# EAGLE board vfd_controller_production (EAGLE 9.6.1)
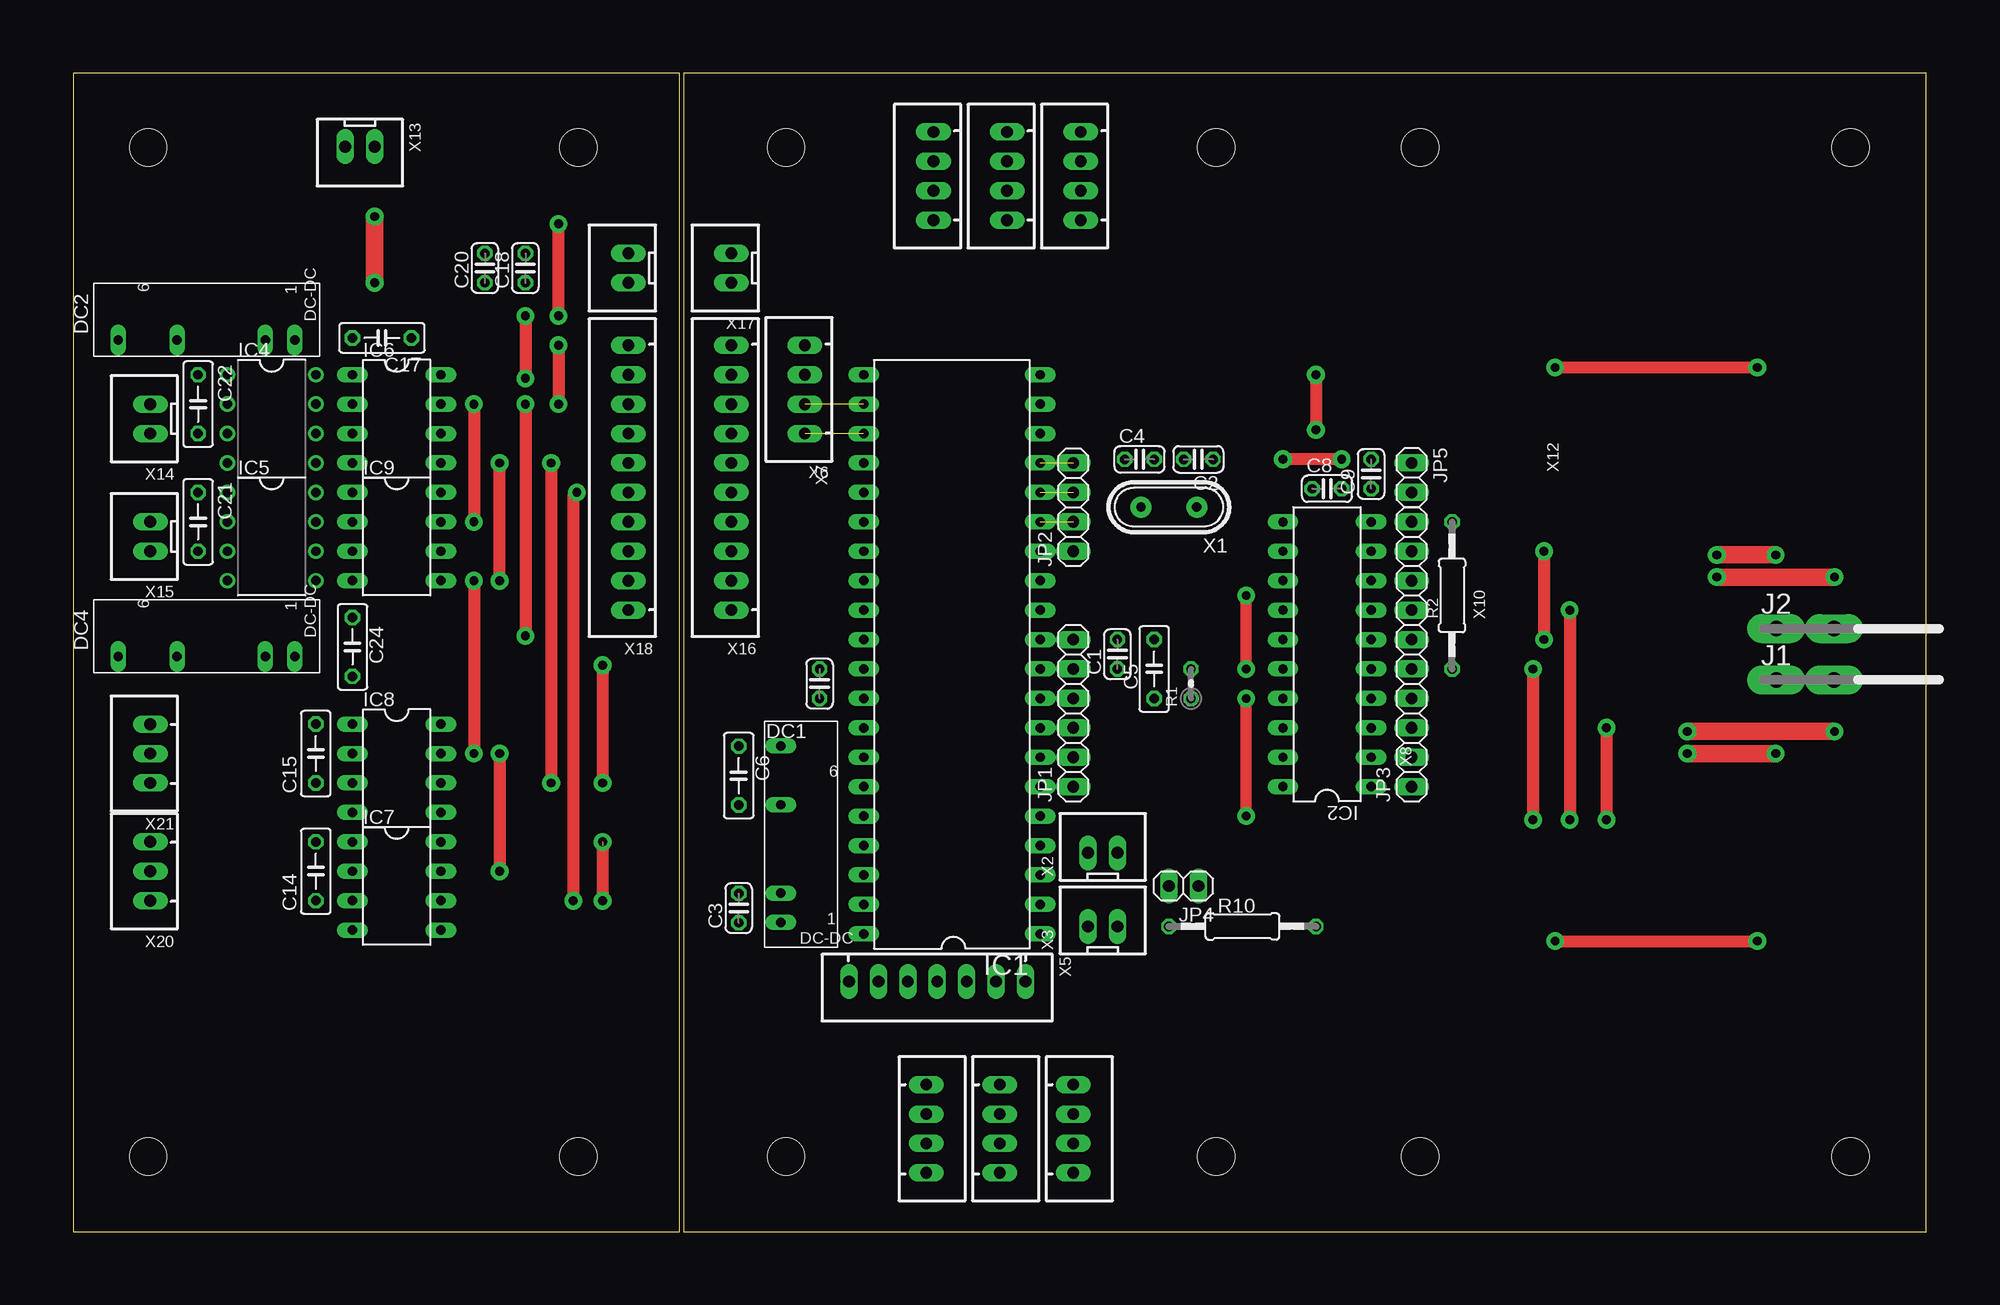
[diagram p0: board, top side]
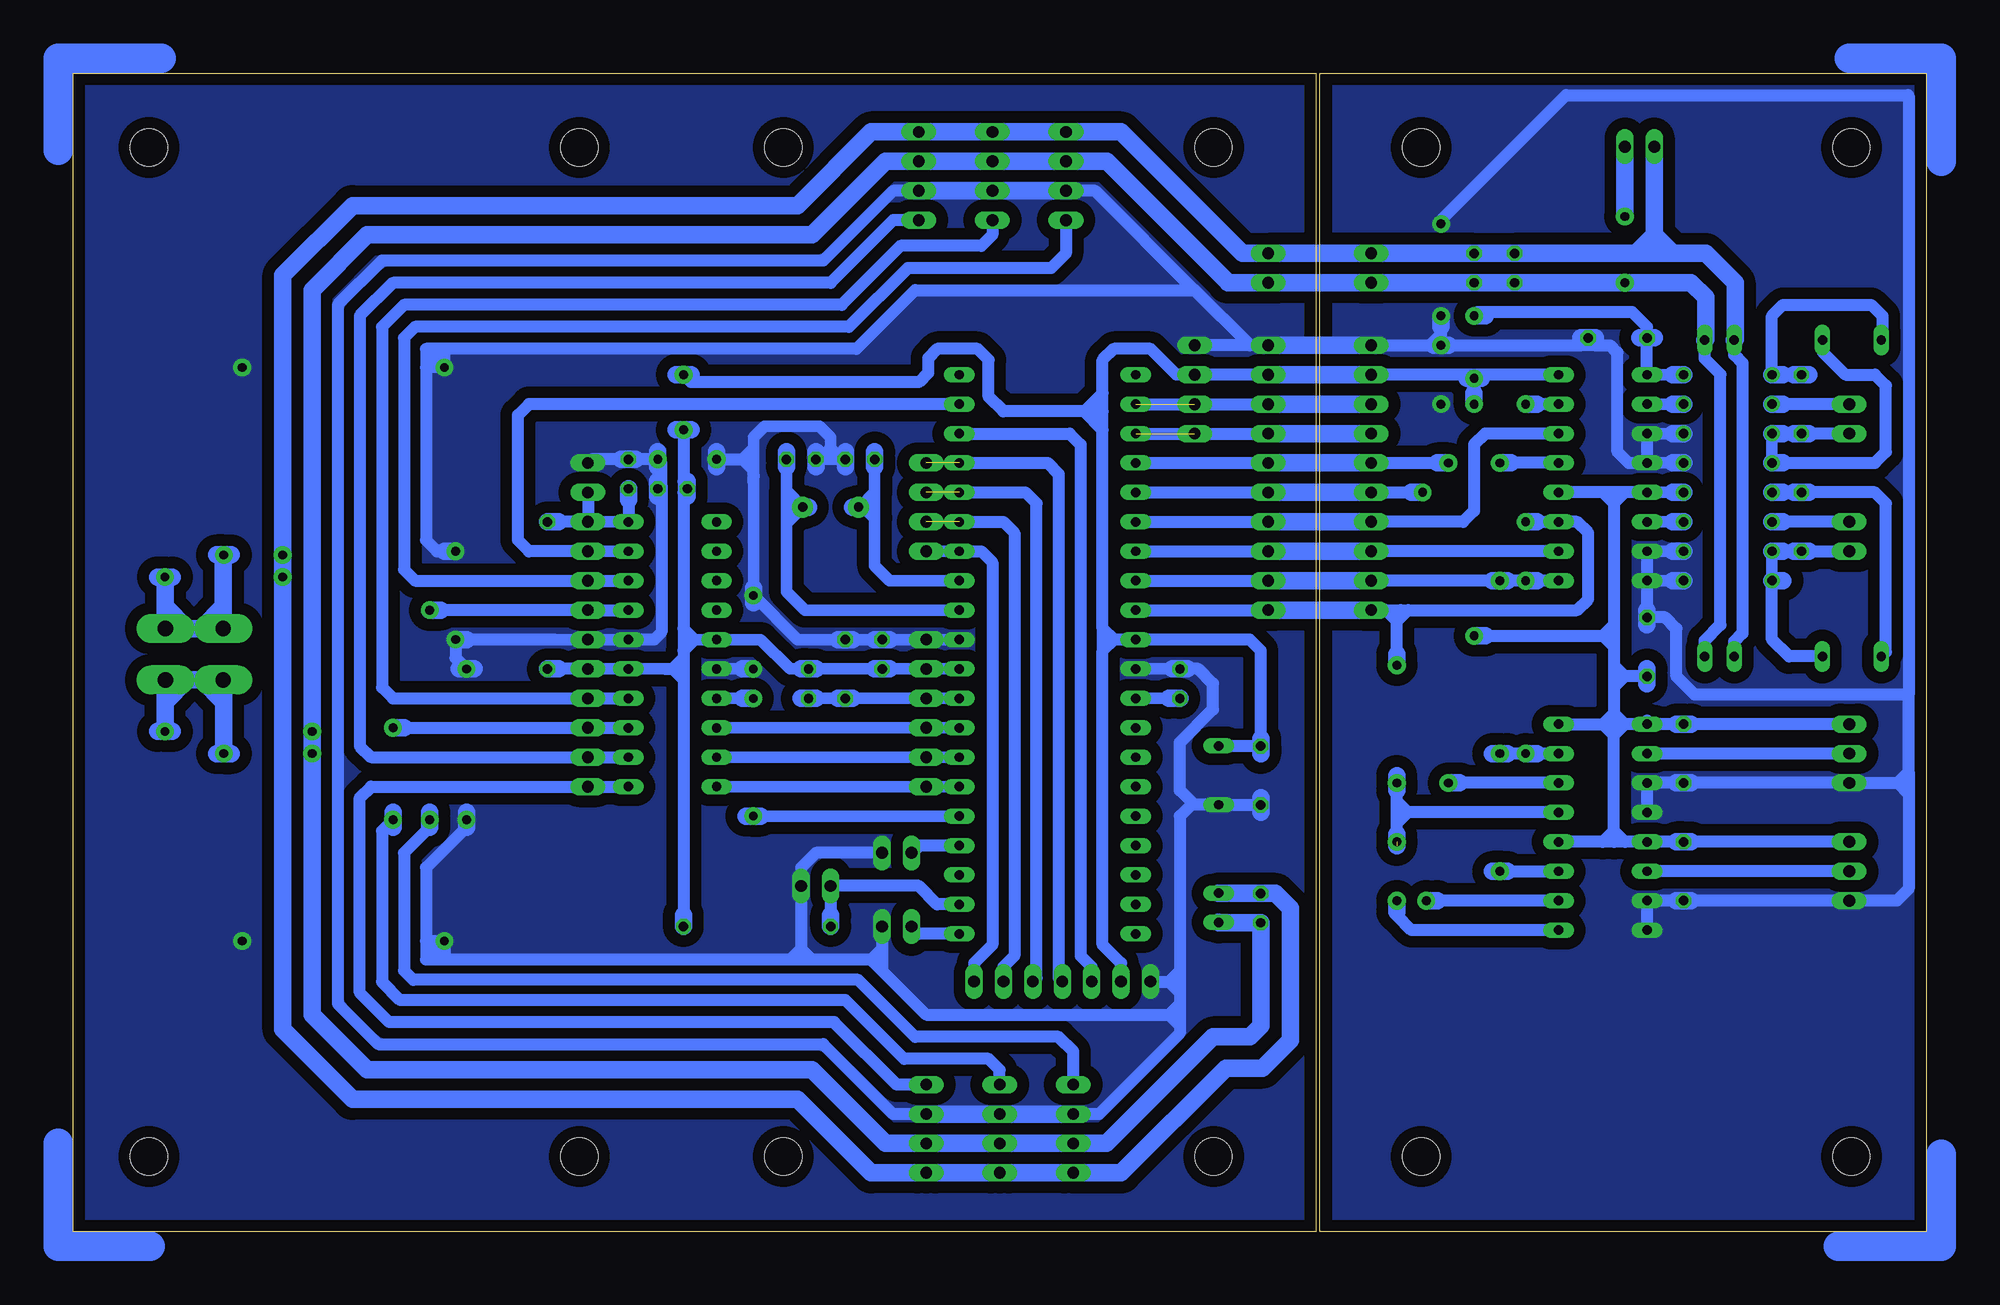
[diagram p1: board, bottom side, seen from below]

Size 160 x 100 mm. Coordinates in mm from the lower left corner, seen from the top.
Outline: 52.71,0 160,0 160,100 52.71,100 52.71,0
Outline: 0,0 52.37,0 52.37,100 0,100 0,0
Copper layers (1*16): Top 0.035mm / dielectric 1.5mm / Bottom 0.035mm
Design rules "default": minimum track width 6mil, minimum drill 0.35mm, track to track 6mil, track to pad 6mil, pad to pad 6mil, via to via 6mil, smd to smd 6mil, copper to edge 40mil, drill to drill 6mil, minimum pad ring 10mil, minimum via ring 8mil, stop-mask expansion 4mil, vias tented up to drill 0mil, thermal gap 10mil
Holes 3.2 mm at 116.31,93.58 153.46,93.58 116.31,6.5 153.46,6.5 61.55,93.58 98.7,93.58 61.55,6.5 98.7,6.5 6.48,93.58 43.62,93.58 6.48,6.5 43.62,6.5

## Footprints (pad centres in the part's own frame; a part is rotated, then mirrored left to right if it is on the bottom)
C025-024X044 = drill 0.813 octagon: 1 -1.27,0; 2 1.27,0
C050-025X075 = drill 0.813 octagon: 1 -2.54,0; 2 2.54,0
MEV = drill 0.813 long: 1 -3.683,-6.756; 2 -3.683,-4.216; 5 -3.683,3.404; 7 -3.683,8.484
DIL40 = drill 0.813 long: 1 -24.13,-7.62; 2 -21.59,-7.62; 3 -19.05,-7.62; 4 -16.51,-7.62; 5 -13.97,-7.62; 6 -11.43,-7.62; 7 -8.89,-7.62; 8 -6.35,-7.62; 9 -3.81,-7.62; 10 -1.27,-7.62; 11 1.27,-7.62; 12 3.81,-7.62; 13 6.35,-7.62; 14 8.89,-7.62; 15 11.43,-7.62; 16 13.97,-7.62; 17 16.51,-7.62; 18 19.05,-7.62; 19 21.59,-7.62; 20 24.13,-7.62; 21 24.13,7.62; 22 21.59,7.62; 23 19.05,7.62; 24 16.51,7.62; 25 13.97,7.62; 26 11.43,7.62; 27 8.89,7.62; 28 6.35,7.62; 29 3.81,7.62; 30 1.27,7.62; 31 -1.27,7.62; 32 -3.81,7.62; 33 -6.35,7.62; 34 -8.89,7.62; 35 -11.43,7.62; 36 -13.97,7.62; 37 -16.51,7.62; 38 -19.05,7.62; 39 -21.59,7.62; 40 -24.13,7.62
DIL20 = drill 0.813 long: 1 -11.43,-3.81; 2 -8.89,-3.81; 3 -6.35,-3.81; 4 -3.81,-3.81; 5 -1.27,-3.81; 6 1.27,-3.81; 7 3.81,-3.81; 8 6.35,-3.81; 9 8.89,-3.81; 10 11.43,-3.81; 11 11.43,3.81; 12 8.89,3.81; 13 6.35,3.81; 14 3.81,3.81; 15 1.27,3.81; 16 -1.27,3.81; 17 -3.81,3.81; 18 -6.35,3.81; 19 -8.89,3.81; 20 -11.43,3.81
DIL08 = drill 0.813 pad 1.3: 1 -3.81,-3.81; 2 -1.27,-3.81; 3 1.27,-3.81; 4 3.81,-3.81; 5 3.81,3.81; 6 1.27,3.81; 7 -1.27,3.81; 8 -3.81,3.81
DIL08' = drill 0.813 long: 1 -3.81,-3.81; 2 -1.27,-3.81; 3 1.27,-3.81; 4 3.81,-3.81; 5 3.81,3.81; 6 1.27,3.81; 7 -1.27,3.81; 8 -3.81,3.81
F061.200 = drill 1.3 pad 2.5 long: 1A -2.5,0; 1B 2.5,0
1X06 = drill 1.016 long: 1 -6.35,0; 2 -3.81,0; 3 -1.27,0; 4 1.27,0; 5 3.81,0; 6 6.35,0
1X04 = drill 1.016 long: 1 -3.81,0; 2 -1.27,0; 3 1.27,0; 4 3.81,0
1X10 = drill 1.016 long: 1 -11.43,0; 2 -8.89,0; 3 -6.35,0; 4 -3.81,0; 5 -1.27,0; 6 1.27,0; 7 3.81,0; 8 6.35,0; 9 8.89,0; 10 11.43,0
1X02 = drill 1.016 long: 1 -1.27,0; 2 1.27,0
0204V = drill 0.813 octagon: 1 -1.27,0; 2 1.27,0
0207/12 = drill 0.813 octagon: 1 -6.35,0; 2 6.35,0
HC49 = drill 0.813 pad 1.8: 1 -2.413,0; 2 2.413,0
JST-XH-02-PACKAGE-LONG-PAD = drill 1.016 long: 1 -1.27,0; 2 1.27,0
JST-XH-07-PACKAGE-LONG-PAD = drill 1.016 long: 1 -7.62,0; 2 -5.08,0; 3 -2.54,0; 4 0,0; 5 2.54,0; 6 5.08,0; 7 7.62,0
JST-XH-04-PACKAGE-LONG-PAD = drill 1.016 long: 1 -3.81,0; 2 -1.27,0; 3 1.27,0; 4 3.81,0
JST-XH-10-PACKAGE-LONG-PAD = drill 1.016 long: 1 -11.43,0; 2 -8.89,0; 3 -6.35,0; 4 -3.81,0; 5 -1.27,0; 6 1.27,0; 7 3.81,0; 8 6.35,0; 9 8.89,0; 10 11.43,0
JST-XH-03-PACKAGE-LONG-PAD = drill 1.016 long: 1 -2.54,0; 2 0,0; 3 2.54,0

## Placement (x,y rotation side)
C1  100n  [C025-024X044]  90.17,49.85 90 top
C2  22p  [C025-024X044]  97.16,66.67 180 top
C3  100n  [C025-024X044]  57.47,27.94 90 top
C4  22p  [C025-024X044]  92.08,66.67 0 top
C5  100n  [C050-025X075]  93.34,48.58 90 top
C6  100n  [C050-025X075]  57.47,39.37 270 top
C7  100n  [C025-024X044]  64.45,47.31 90 top
C8  100n  [C025-024X044]  108.27,64.14 0 top
C9  100n  [C025-024X044]  112.08,65.41 90 top
C14  100n  [C050-025X075]  20.96,31.11 90 top
C15  100n  [C050-025X075]  20.96,41.28 90 top
C17  100n  [C050-025X075]  26.67,77.15 180 top
C18  100n  [C025-024X044]  39.05,83.19 90 top
C20  100n  [C025-024X044]  35.56,83.19 90 top
C21  100n  [C050-025X075]  10.79,61.28 270 top
C22  100n  [C050-025X075]  10.79,71.44 270 top
C24  100n  [C050-025X075]  24.13,50.48 270 top
DC1  12V in, 5V out  [MEV]  64.8,33.45 0 top
DC2  12V in, 5V out  [MEV]  12.38,80.64 90 top
DC4  12V in, 5V out  [MEV]  12.38,53.34 90 top
IC1  Atmega1284P  [DIL40]  75.88,49.85 90 top
IC2  Attiny861A  [DIL20]  108.27,49.85 90 top
IC4  HCPL-7840  [DIL08]  17.15,70.17 270 top
IC5  HCPL-7840  [DIL08]  17.15,60.01 270 top
IC6  MPC3201  [DIL08']  27.94,70.17 270 top
IC7  MPC3201  [DIL08']  27.94,29.84 270 top
IC8  MPC3201  [DIL08']  27.94,40 270 top
IC9  MPC3201  [DIL08']  27.94,60.01 270 top
J1  [F061.200]  149.54,47.62 0 top
J2  [F061.200]  149.54,52.07 0 top
JP1  1x6  [1X06]  86.36,44.77 90 top
JP2  1x4  [1X04]  86.36,62.55 90 top
JP3  1x10  [1X10]  115.57,49.85 90 top
JP4  [1X02]  95.89,29.84 180 top
JP5  [1X02]  115.57,65.09 270 top
R1  10k  [0204V]  96.52,47.31 90 top
R2  10k  [0207/12]  119.06,54.93 90 top
R10  10k  [0207/12]  100.97,26.35 0 top
U$1  [A4L-LOC]  -53.98,-45.72 0 top  (outside the outline)
X1  20MHz  [HC49]  94.62,62.55 180 top
X2  [JST-XH-02-PACKAGE-LONG-PAD]  88.9,32.7 0 top
X3  [JST-XH-02-PACKAGE-LONG-PAD]  88.9,26.35 0 top
X5  JST-XH-07-PIN-LONG-PAD  [JST-XH-07-PACKAGE-LONG-PAD]  74.61,21.59 180 top
X6  [JST-XH-04-PACKAGE-LONG-PAD]  63.18,72.71 90 top
X7  [JST-XH-04-PACKAGE-LONG-PAD]  86.36,8.89 270 top
X8  [JST-XH-04-PACKAGE-LONG-PAD]  87,91.12 90 top
X9  [JST-XH-04-PACKAGE-LONG-PAD]  80.01,8.89 270 top
X10  [JST-XH-04-PACKAGE-LONG-PAD]  80.65,91.12 90 top
X11  [JST-XH-04-PACKAGE-LONG-PAD]  73.66,8.89 270 top
X12  [JST-XH-04-PACKAGE-LONG-PAD]  74.3,91.12 90 top
X13  JST-XH-02-PIN-LONG-PAD  [JST-XH-02-PACKAGE-LONG-PAD]  24.76,93.66 180 top
X14  [JST-XH-02-PACKAGE-LONG-PAD]  6.67,70.17 90 top
X15  [JST-XH-02-PACKAGE-LONG-PAD]  6.67,60.01 90 top
X16  JST-XH-10-PIN-LONG-PAD  [JST-XH-10-PACKAGE-LONG-PAD]  56.83,65.09 90 top
X17  JST-XH-02-PIN-LONG-PAD  [JST-XH-02-PACKAGE-LONG-PAD]  56.83,83.19 90 top
X18  JST-XH-10-PIN-LONG-PAD  [JST-XH-10-PACKAGE-LONG-PAD]  47.94,65.09 90 top
X19  JST-XH-02-PIN-LONG-PAD  [JST-XH-02-PACKAGE-LONG-PAD]  47.94,83.19 90 top
X20  JST-XH-03-PIN-LONG-PAD  [JST-XH-03-PACKAGE-LONG-PAD]  6.67,31.11 90 top
X21  JST-XH-03-PIN-LONG-PAD  [JST-XH-03-PACKAGE-LONG-PAD]  6.67,41.28 90 top

## Library data of the parts
C1 C3 C7-C9 C18 C20 = rcl; R: MKS02-63 100N; SPICEPREFIX: C
C2 C4 = rcl; R: KERKO 22p; SPICEPREFIX: C
C5 C6 C14 C15 C17 C21 C22 C24 = rcl; R: MKS2-63 100N; SPICEPREFIX: C
DC1 DC2 DC4 = custom; R: MEV1S1205SC
IC1 = ic-package; R: ATMEGA 1284-P-PU
IC2 = ic-package; R: ATTINY 861A-PU
IC4 IC5 = avago; MPN: HCPL-7800A#500; OC_FARNELL: 459446; OC_NEWARK: 05M6395
IC6-IC9 = ic-package; R: MPC 3201-CI/P
J1 J2 = con-faston; OC_FARNELL: unknown; OC_NEWARK: unknown; R: FS-PW-6,35
JP1 = pinhead; R: MPE 087-1-006
JP2 = pinhead; R: MPE 087-1-004
JP3 = pinhead; R: MPE 087-1-010
JP4 JP5 = pinhead
R1 R2 R10 = rcl; R: METALL 10,0K; SPICEPREFIX: R
U$1 = frames
X1 = IQD-Frequency-Products; R: 20,0000-HC49U-S
X2 X3 X14 X15 =  JST_XH_connnectors; R: JST XH2P ST
X5 X13 X16-X21 =  JST_XH_connnectors
X6-X12 =  JST_XH_connnectors; R: JST XH4P ST

## Nets
0V: C3.2 C18.2 C20.2 DC1.2 DC2.2 DC4.2 J2.1A J2.1B X7.4 X8.4 X9.4 X10.4 X11.4 X12.4 X13.2 X17.2 X19.2
232RX: IC1.16 JP2.3 X5.3
232TX: IC1.17 JP2.4 X5.4
485DE: IC1.18 X5.5
485RX: IC1.14 JP2.1 X5.1
485TX: IC1.15 JP2.2 X5.2
+5V: C1.1 C6.1 C8.1 C14.2 C15.2 C17.2 C24.2 DC1.7 IC1.10 IC1.30 IC2.5 IC2.15 IC4.8 IC5.8 IC6.1 IC6.8 IC7.1 IC7.8 IC8.1 IC8.8 IC9.1 IC9.8 JP1.5 JP3.5 R1.2 R2.1 R10.2 X5.6 X6.3 X16.9 X18.9 X20.3 X21.3
+12V: C3.1 C18.1 C20.1 DC1.1 DC2.1 DC4.1 J1.1A J1.1B X7.3 X8.3 X9.3 X10.3 X11.3 X12.3 X13.1 X17.1 X19.1
EN_SVPWM: IC1.19 IC2.9 JP3.9
GND: C1.2 C2.2 C4.2 C5.2 C6.2 C7.2 C8.2 C9.2 C14.1 C15.1 C17.1 C24.1 DC1.5 IC1.11 IC1.31 IC2.6 IC2.16 IC4.5 IC4.6 IC5.5 IC5.6 IC6.3 IC6.4 IC7.3 IC7.4 IC8.3 IC8.4 IC9.3 IC9.4 JP1.6 JP3.6 JP4.1 JP5.1 X2.2 X3.2 X5.7 X6.4 X7.2 X8.2 X9.2 X10.2 X11.2 X12.2 X16.10 X18.10 X20.1 X21.1
H1: IC2.1 JP3.1 X7.1
H2: IC2.3 JP3.3 X9.1
H3: IC2.7 JP3.7 X11.1
IO0: IC1.22 X6.2 X16.8 X18.8
IO1: IC1.23 X6.1 X16.7 X18.7
IO2: IC1.24 IC8.6 X16.6 X18.6
IO3: IC1.25 IC7.6 X16.5 X18.5
IO4: IC1.26 IC6.6 X16.4 X18.4
IO5: IC1.27 IC9.6 X16.3 X18.3
IO6: IC1.28 IC6.5 IC7.7 IC8.7 IC9.5 X16.2 X18.2
IO7: IC1.29 IC6.7 IC7.5 IC8.5 IC9.7 X16.1 X18.1
L1: IC2.2 JP3.2 X8.1
L2: IC2.4 JP3.4 X10.1
L3: IC2.8 JP3.8 X12.1
MISO: IC1.7 IC2.19 JP1.2
MOSI: IC1.6 IC2.20 JP1.1
N$2: IC8.2 X21.2
N$3: IC7.2 X20.2
N$4: IC1.1 X3.1
N$5: C21.1 DC4.7 IC5.1
N$13: C21.2 DC4.5 IC5.3 IC5.4 X15.1
N$14: IC4.2 X14.2
N$16: C7.1 IC1.32
N$17: IC4.7 IC6.2
N$19: C22.2 DC2.5 IC4.3 IC4.4 X14.1
N$21: IC5.2 X15.2
N$22: C22.1 DC2.7 IC4.1
N$23: IC1.4 X2.1
N$24: IC1.2 JP4.2 R10.1
N$32: IC5.7 IC9.2
N$37: C9.1 IC2.10 JP3.10 JP5.2 R2.2
N$41: C5.1 IC1.9 JP1.4 R1.1
N$43: C2.1 IC1.12 X1.1
N$44: C4.1 IC1.13 X1.2
SCK: IC1.8 IC2.18 JP1.3
SS: IC1.5 IC2.17

## Tracks (layer width: path | path; a pad name or v marks a point on that pad's centre or on a via)
0V  (via drill 0.76 pad 1.52)
  Top 1.524: v141.92,58.42 v147,58.42 | v152.08,56.52 v141.92,56.52
  Bottom 1.016: DC4.2 16.6,50.93 15.87,51.65 15.87,74.97 16.6,75.69 DC2.2
  Bottom 1.524: 148.91,52.07 J2.1A 147.04,53.97 | 148.91,52.07 150.18,52.07 | 150.18,52.07 J2.1B 152.08,52.11 152.08,53.97 | DC1.2 61.09,29.21 C3.2 56.2,29.21 54.93,27.94 54.93,16.51 57.31,14.13 60.48,14.13 69.53,5.08 X11.4 X9.4 X7.4 91.12,5.08 97.47,11.43 135.89,11.43 141.92,17.46 v141.92,58.42 141.92,82.55 135.89,88.58 97.47,88.58 91.12,94.93 X8.4 X10.4 X12.4 69.53,94.93 59.05,84.46 X17.2 X19.2 C18.2 C20.2 25.08,84.46 | v152.08,56.52 152.08,53.97 | v147,58.42 147.04,58.38 147.04,53.97 | 147.04,53.97 148.91,52.11 148.91,52.07 | 152.08,53.97 150.18,52.07 | v147,58.42 146.37,58.42 | v147,58.42 147.64,58.42 | v152.08,56.52 151.45,56.52 | v152.08,56.52 152.72,56.52 | X13.2 23.49,86.04 | 23.49,84.46 23.49,86.04 | 23.49,84.46 25.08,84.46 | DC2.2 16.51,77.05 16.51,81.92 19.05,84.46 21.91,84.46 | 23.49,84.46 21.91,84.46 | 23.49,86.04 21.91,84.46 | 23.49,86.04 25.08,84.46
232RX  (1 unrouted)
  Bottom 1.016: IC1.16 77.79,63.82 76.84,62.86 76.84,21.91 X5.3
232TX  (1 unrouted)
  Bottom 1.016: IC1.17 75.88,66.36 74.93,65.41 74.93,21.91 X5.4
485DE
  Bottom 1.016: IC1.18 73.98,68.9 73.03,67.95 73.03,23.81 72.07,22.86 X5.5
485RX
  Bottom 1: IC1.14 JP2.1
  Bottom 1.016: IC1.14 81.6,58.74 80.65,57.78 80.65,24.77 82.23,23.18 X5.1
485TX  (1 unrouted)
  Bottom 1.016: IC1.15 79.69,61.28 78.74,60.33 78.74,23.81 79.69,22.86 X5.2
+5V  (via drill 0.76 pad 1.52)
  Top 1.016: v107.31,73.98 v107.31,69.22 | v39.05,71.44 v39.05,51.44 | v39.05,79.06 v39.05,73.66
  Bottom 1: IC1.10 JP1.5 89.53,48.58 | JP3.5 IC2.5 108.9,48.58 | 107.31,50.17 106.36,51.12 IC2.15 100.65,51.12 98.11,48.58 97.16,48.58 | C1.1 95.89,48.58 | 21.91,63.82 IC9.1 | 21.91,73.98 IC6.1
  Bottom 1.016: X16.9 X6.3 | X6.3 64.13,73.98 | X6.3 64.77,73.98 66.99,76.2 70.17,76.2 71.12,75.25 71.12,72.39 | C6.1 61.09,41.91 DC1.7 | 70.17,51.12 IC1.30 58.42,51.12 57.47,50.17 57.47,42.55 | 70.17,51.12 71.12,52.07 | 71.12,52.07 71.12,69.22 | 71.12,69.22 71.12,70.8 | 71.12,70.8 71.12,72.39 | 70.17,51.12 71.12,50.17 | 71.12,50.17 71.12,24.77 69.53,23.18 X5.6 | 71.12,52.07 71.12,50.17 | v107.31,73.98 106.68,73.34 87,73.34 86.2,74.14 86.2,75.41 85.41,76.2 81.91,76.2 80.96,75.25 80.96,72.07 79.69,70.8 72.71,70.8 | 107.31,52.07 106.36,51.12 | v107.31,69.22 107.31,64.77 | 107.31,64.77 107.31,63.82 | 107.31,63.82 107.31,52.07 | 107.31,49.53 107.31,50.17 107.31,52.07 | 107.31,49.53 107.31,47.62 | 107.31,47.62 107.31,27.31 | 108.27,48.58 107.31,49.53 | 108.9,48.58 108.27,48.58 | 108.27,48.58 107.31,47.62 | 71.12,69.22 72.71,70.8 | 72.71,70.8 71.12,72.39 | 72.71,70.8 71.12,70.8 | JP3.5 118.11,48.58 | 107,64.45 107.31,64.77 | C8.1 107.31,63.82 | IC6.8 38.1,73.98 | 38.1,73.98 40.01,73.98 | 40.01,73.98 X18.9 | 39.05,72.39 39.05,73.03 | 39.05,73.03 38.42,73.66 38.1,73.98 | 39.05,73.03 39.69,73.66 40.01,73.98 | 27.94,63.82 26.99,62.86 | 27.94,63.82 IC9.8 | 26.99,62.86 26.04,63.82 | IC9.1 26.04,63.82 | 26.04,63.82 27.94,63.82 | X20.3 20.32,33.66 | 21.59,33.66 IC7.1 26.04,33.66 | X21.3 20.32,43.81 | 21.59,43.81 23.81,43.81 24.13,44.13 IC8.1 26.04,43.81 | IC8.8 27.94,43.81 | 27.94,43.81 26.99,43.81 | 26.04,43.81 26.99,43.81 | 26.04,33.66 26.99,33.66 | 26.99,33.66 27.94,33.66 | 27.94,33.66 IC7.8 | 26.99,62.86 26.99,52.39 | 26.99,52.39 26.99,50.48 | 26.99,50.48 26.99,48.89 | 26.99,48.89 26.99,46.99 | 26.99,46.99 26.99,44.77 | IC6.1 C17.2 24.13,78.11 25.4,79.38 38.73,79.38 v39.05,79.06
  Bottom 1.016: 26.99,43.81 26.99,44.77 | 26.99,43.81 26.99,42.86 | 26.99,34.61 26.99,42.86 | 26.99,33.66 26.99,34.61 | 26.99,34.61 26.04,33.66 | 26.99,34.61 27.94,33.66 | 26.99,42.86 26.04,43.81 | 26.99,42.86 27.94,43.81 | 26.99,44.77 26.04,43.81 | 26.99,44.77 27.94,43.81 | C24.2 26.04,47.94 | 26.99,48.89 26.04,47.94 | 26.04,47.94 26.99,46.99 | 26.99,50.48 27.94,51.44 | 38.1,51.44 27.94,51.44 | 27.94,51.44 26.99,52.39
  Bottom 1.524: 90.81,48.58 C1.1 89.53,48.58 | C8.1 107,63.82 | C8.1 107,64.45 | C8.1 107,64.77 | C8.1 107,63.5 | 106.68,69.22 v107.31,69.22 107.95,69.22 | R2.1 118.11,48.58 | R10.2 107.31,27.31 | 95.89,48.58 R1.2 97.16,48.58 | 106.68,73.98 v107.31,73.98 107.95,73.98 | 57.47,41.28 C6.1 57.47,42.55 | IC5.8 21.91,63.82 | 20.32,33.66 C14.2 21.59,33.66 | 20.32,43.81 C15.2 21.59,43.81 | 24.13,47.31 C24.2 24.13,48.58 | IC4.8 21.91,73.98 | 23.49,77.15 C17.2 24.76,77.15 | v39.05,79.06 38.1,79.06 | 38.42,73.66 v39.05,73.66 39.69,73.66 | v39.05,71.44 39.05,72.39 | v39.05,51.44 38.1,51.44 | X18.9 X16.9
+12V  (via drill 0.76 pad 1.52)
  Top 1.524: v139.38,41.28 v147,41.28 | v139.38,43.18 v152.08,43.18 | v26.04,87.63 v26.04,81.92
  Bottom 1.016: DC4.1 19.14,51.03 17.78,52.39 17.78,74.02 19.14,75.37 DC2.1
  Bottom 1.524: 148.91,47.62 J1.1A 147,47.59 147,45.72 | 148.91,47.62 150.18,47.62 | 150.18,47.62 J1.1B 152.08,47.59 152.08,45.72 | DC1.1 61.09,26.67 C3.1 57.47,17.78 58.42,16.83 61.59,16.83 70.8,7.62 X11.3 X9.3 X7.3 89.85,7.62 96.2,13.97 134.62,13.97 139.38,18.73 v139.38,41.28 139.38,81.28 134.62,86.04 96.2,86.04 89.85,92.39 X8.3 X10.3 X12.3 70.76,92.39 60.32,81.96 60.32,81.92 X17.1 X19.1 C18.1 C20.1 | v152.08,43.18 152.08,45.72 | v147,41.28 147,45.72 | 147,45.72 148.91,47.62 | 152.08,45.72 150.18,47.62 | v147,41.28 146.37,41.28 | v147,41.28 147.64,41.28 | v152.08,43.18 151.45,43.18 | v152.08,43.18 152.72,43.18 | DC2.1 19.05,77.05 19.05,80.64 20.32,81.92 C20.1 | X13.1 v26.04,87.63 | v26.04,81.92 C20.1
EN_SVPWM
  Bottom 1: IC2.9 JP3.9
  Bottom 1.016: IC1.19 120.65,71.44 121.6,70.48 121.6,59.69 120.65,58.74 JP3.9
GND  (via drill 0.75 pad 1.52, 0.76 pad 1.52)
  Top 1: v101.28,54.93 v101.28,48.58
  Top 1.016: v127,58.74 v127,51.12 | v126.05,48.58 v126.05,35.56 | v109.54,66.67 v104.46,66.67 | v127.95,74.61 v145.41,74.61 | v127.95,25.08 v145.41,25.08 | v41.91,76.52 v41.91,71.44 | v41.91,79.06 v41.91,87
  Bottom 1: IC1.11 JP1.6 89.53,51.12 | IC2.6 JP3.6 118.43,51.12 | 90.81,51.12 92.71,51.12 | 93.98,51.12 97.47,51.12 v101.28,54.93 101.28,65.09 101.28,65.72 101.28,67.63 101.28,68.58 100.33,69.53 95.57,69.53 94.62,68.58 94.62,67.63 | 102.24,48.58 IC2.16 | 65.09,48.58 IC1.31 | 94.62,66.67 C4.2 93.66,66.67 94.62,67.63 | 94.62,66.67 C2.2 95.57,66.67 94.62,67.63 | 94.62,67.63 94.62,66.67 | 21.91,56.2 IC9.4 | 21.91,58.74 IC9.3 | 21.91,68.9 IC6.3 | 21.91,66.36 IC6.4
  Bottom 1.016: 101.28,64.77 101.28,65.09 101.28,65.41 | X7.2 89.22,10.16 95.25,16.19 133.67,16.19 137.16,19.69 137.16,80.01 133.35,83.82 95.25,83.82 89.22,89.85 X8.2 | X11.2 71.44,10.16 64.45,17.15 64.45,17.78 | 90.17,22.54 86.36,18.73 65.41,18.73 | 90.17,22.54 91.12,23.5 | X16.10 58.42,76.52 | 58.42,76.52 X6.4 | 58.42,76.52 63.18,81.28 | 63.18,81.28 71.75,89.85 X12.2 | 91.12,23.5 96.2,23.5 | 96.2,23.5 98.11,23.5 | 98.11,23.5 127.95,23.5 | 127.95,23.5 129.22,23.5 | 129.22,23.5 129.54,23.5 129.54,25.08 | 127.95,76.2 92.39,76.2 87.31,81.28 63.18,81.28 | 127.95,76.2 129.54,76.2 129.54,74.61 | 129.54,74.61 129.54,59.69 128.59,58.74 127.95,58.74 | C6.2 61.09,36.83 DC1.5 63.48,36.86 | 63.48,36.86 64.45,35.88 64.45,22.54 | 64.45,22.54 64.45,21.59 | 64.45,21.59 64.45,20.64 | 64.45,20.64 64.45,19.69 | 64.45,19.69 64.45,17.78 | v127,51.12 127,49.53 v126.05,48.58 | 129.54,25.08 129.54,31.43 126.05,34.92 | 63.48,36.86 63.48,37.12 64.45,38.1 64.45,42.23 61.59,45.09 61.59,47.31 62.87,48.58 63.82,48.58 64.13,48.58 | 91.12,23.5 90.17,24.45 | 90.17,24.45 90.17,22.54 | X3.2 90.17,24.45 | X5.7 65.41,21.59 | 64.45,21.59 65.41,21.59 | 64.45,22.54 65.41,21.59 | 65.41,21.59 64.45,20.64 | 64.45,19.69 65.41,18.73 | 65.41,18.73 64.45,17.78 | X2.2 95.89,32.7 97.16,31.43 JP4.1 97.16,24.45 | 97.16,24.45 96.2,23.5 | 97.16,24.45 98.11,23.5 | IC2.6 109.86,51.12 109.22,51.75 109.22,63.82 | v104.46,66.67 102.24,66.67 | 102.24,66.67 101.92,66.67 | v127.95,25.08 129.54,25.08 | v127.95,25.08 127.95,23.5 | v127.95,25.08 129.22,23.81 129.22,23.5 | v127.95,74.61 127.95,76.2 | v127.95,74.61 129.54,74.61 | v127.95,74.61 128.91,75.56 | 118.43,51.12 126.05,51.12 | 109.22,64.45 109.22,63.82
  Bottom 1.016: 109.22,63.82 C8.2 109.22,64.45 | 101.28,67.63 102.24,66.67 | 102.24,66.67 101.28,65.72 | 109.22,64.45 109.22,66.36 v109.54,66.67 111.44,66.67 | 112.71,66.67 115.25,66.67 JP5.1 | IC6.3 IC6.4 25.72,66.36 26.67,67.31 26.67,75.88 27.3,76.52 28.57,76.52 | IC9.3 IC9.4 24.13,53.66 | 46.35,76.52 X18.10 42.86,76.52 | 42.86,76.52 42.54,76.52 | 41.91,78.11 41.91,77.47 | v41.91,76.52 41.91,77.47 | 41.91,77.47 42.86,76.52 | 1.52,39.69 1.52,46.36 | 20.32,28.58 X20.1 2.54,28.58 1.52,29.59 1.52,37.78 | 20.32,38.73 X21.1 2.48,38.73 | IC8.4 IC8.3 21.59,38.73 | IC7.4 IC7.3 21.59,28.58 | 1.52,39.69 1.52,37.78 | 2.48,38.73 1.52,39.69 | 2.48,38.73 1.52,37.78 | 28.57,76.52 C17.1 29.84,76.52 | 41.27,76.52 29.84,76.52 | 28.57,76.52 29.84,76.52 | 1.52,46.36 20,46.36 21.59,47.94 21.59,52.07 22.54,53.02 C24.1 | v41.91,87 41.91,87.31 31.12,98.11 1.59,98.11 1.52,98.04 1.52,46.36
  Bottom 1.524: 64.13,48.58 C7.2 | C7.2 65.09,48.58 | 101.28,55.56 v101.28,54.93 101.28,54.29 | v101.28,48.58 102.24,48.58 | 90.81,51.12 C1.2 89.53,51.12 | X12.2 X10.2 X8.2 | X11.2 X9.2 X7.2 | 93.34,67.31 C4.2 93.34,66.04 | 95.89,67.31 C2.2 95.89,66.04 | 104.46,67.31 v104.46,66.67 104.46,66.04 | C8.2 109.54,64.45 | C8.2 109.54,63.82 | C8.2 109.54,64.77 | C8.2 109.54,63.5 | 109.54,66.04 v109.54,66.67 109.54,67.31 | 111.44,66.67 C9.2 112.71,66.67 | 125.41,48.58 v126.05,48.58 126.68,48.58 | v127,51.12 126.05,51.12 | v127,58.74 127.95,58.74 | 126.05,36.2 v126.05,35.56 126.05,34.92 | 92.71,51.12 C5.2 93.98,51.12 | C7.2 63.82,48.58 | 57.47,37.47 C6.2 57.47,36.2 | IC5.6 21.91,58.74 | IC5.5 21.91,56.2 | 20.32,28.58 C14.1 21.59,28.58 | 20.32,38.73 C15.1 21.59,38.73 | 24.13,52.39 C24.1 24.13,53.66 | IC4.5 21.91,66.36 | IC4.6 21.91,68.9 | 28.57,77.15 C17.1 29.84,77.15 | v41.91,79.06 41.91,78.11 | 41.27,76.52 v41.91,76.52 42.54,76.52 | X18.10 X16.10
  pour Bottom (isolate 1, no thermals): 53.66,100.01 160.02,100.01 160.02,0 53.66,0
  pour Bottom (isolate 1, no thermals): 0,100.01 51.43,100.01 51.43,0 0,0
H1
  Bottom 1.016: IC2.1 JP3.1 134.3,38.42 135.25,37.47 135.25,20.64 132.72,18.1 94.3,18.1 88.9,12.7 X7.1
H2  (via drill 0.76 pad 1.52)
  Top 1.016: v132.4,43.5 v132.4,35.56
  Bottom 1.016: IC2.3 JP3.3 131.44,43.5 | X9.1 80.01,13.97 80.96,14.92 88.27,14.92 93.34,20 131.76,20 133.35,21.59 133.35,34.61 v132.4,35.56
  Bottom 1.524: v132.4,43.5 131.44,43.5 | 132.4,36.2 v132.4,35.56 132.4,34.92
H3  (via drill 0.76 pad 1.52)
  Top 1.016: v129.22,53.66 v129.22,35.56
  Bottom 1.016: IC2.7 JP3.7 128.27,53.66 | X11.1 73.66,15.56 74.93,16.83 87.31,16.83 92.23,21.75 130.65,21.75 131.44,22.54 131.44,32.7 129.22,34.92
  Bottom 1.524: v129.22,53.66 128.27,53.66 | 129.22,36.2 v129.22,35.56 129.22,34.92
IO0  (1 unrouted)
  Bottom 1.016: IC1.22 X16.8
  Bottom 1.524: X18.8 X16.8
IO1  (1 unrouted)
  Bottom 1.016: IC1.23 X16.7
  Bottom 1.524: X18.7 X16.7
IO2  (via drill 0.76 pad 1.52)
  Top 1.016: v41.27,66.36 v41.27,38.73
  Bottom 1.016: IC1.24 X16.6 | X18.6 42.23,66.36 | IC8.6 40.32,38.73
  Bottom 1.524: v41.27,66.36 42.23,66.36 | v41.27,38.73 40.32,38.73 | X18.6 X16.6
IO3  (via drill 0.76 pad 1.52)
  Top 1.016: v43.5,63.82 43.18,63.5 v43.18,28.58
  Bottom 1.016: IC1.25 X16.5 | X18.5 44.45,63.82 | IC7.6 42.23,28.58
  Bottom 1.524: v43.5,63.82 44.45,63.82 | v43.18,28.58 42.23,28.58 | X18.5 X16.5
IO4
  Bottom 1.016: IC1.26 X16.4 | IC6.6 38.1,68.9 39.05,67.95 39.05,62.23 40.01,61.28 X18.4
  Bottom 1.524: X18.4 X16.4
IO5
  Bottom 1.016: IC1.27 X16.3 | IC9.6 X18.3
  Bottom 1.524: X18.3 X16.3
IO6  (via drill 0.76 pad 1.52)
  Top 1.016: v36.83,56.2 v36.83,66.36 | v34.61,56.2 v34.61,41.28 | v36.83,41.28 v36.83,31.11
  Bottom 1.016: IC1.28 X16.2 | IC6.5 35.88,66.36 | IC9.5 33.65,56.2 | v34.61,56.2 36.2,56.2 | 37.46,56.2 X18.2 | IC8.7 33.65,41.28 | v34.61,41.28 36.2,41.28 | 36.2,31.11 IC7.7
  Bottom 1.524: v36.83,66.36 35.88,66.36 | v34.61,56.2 33.65,56.2 | 36.2,56.2 v36.83,56.2 37.46,56.2 | v34.61,41.28 33.65,41.28 | 36.2,41.28 v36.83,41.28 37.46,41.28 | 36.2,31.11 v36.83,31.11 37.46,31.11 | X18.2 X16.2
IO7  (via drill 0.76 pad 1.52)  (1 unrouted)
  Top 1.016: v34.61,71.44 v34.61,61.28 | v45.72,48.89 v45.72,38.73 | v45.72,33.66 v45.72,28.58
  Bottom 1.016: IC1.29 X16.1 | 33.65,61.28 IC9.7 30.16,61.28 29.21,60.33 29.21,54.61 30.16,53.66 44.77,53.66 | IC6.7 33.65,71.44 | X18.1 46.67,53.66 | 46.67,53.66 45.4,53.66 | 45.4,53.66 44.77,53.66 | IC7.5 44.45,26.03 45.72,27.31 45.72,27.62 45.72,27.94 | 45.4,53.66 45.72,53.34 45.72,52.7 | 45.72,35.24 45.72,37.15 | 45.72,37.15 44.77,36.2 | IC8.5 44.77,36.2 | 44.77,36.2 45.72,35.24 | 45.72,52.7 44.77,53.66 | 45.72,52.7 46.67,53.66 | 45.72,34.29 45.72,35.24 | 45.72,37.15 45.72,38.1 | 45.72,49.85 45.72,52.7
  Bottom 1.524: v34.61,71.44 33.65,71.44 | v34.61,61.28 33.65,61.28 | v45.72,48.89 45.72,49.85 | 45.72,39.37 v45.72,38.73 45.72,38.1 | 45.72,33.34 45.72,34.29 | v45.72,28.58 45.72,27.62 | X18.1 X16.1
L1
  Bottom 1.016: IC2.2 JP3.2 134.3,40.96 135.25,41.91 135.25,79.06 132.4,81.92 94.62,81.92 89.22,87.31 X8.1
L2
  Bottom 1.016: IC2.4 JP3.4 132.4,46.04 133.35,46.99 133.35,78.11 131.44,80.01 93.66,80.01 88.58,85.09 81.6,85.09 80.65,86.04 X10.1
L3
  Bottom 1.016: IC2.8 JP3.8 130.49,56.2 131.44,57.15 131.44,77.15 130.49,78.11 93.03,78.11 87.95,83.19 75.56,83.19 74.3,84.46 X12.1
MISO
  Bottom 1: IC1.7 JP1.2 IC2.19
MOSI
  Bottom 1: IC1.6 JP1.1 IC2.20
N$2
  Bottom 1.016: X21.2 IC8.2
N$3
  Bottom 1.016: X20.2 IC7.2
N$4
  Bottom 1.016: IC1.1 87,25.72 X3.1
N$5
  Bottom 1.016: 11.43,63.82 12.38,63.82 | DC4.7 3.49,50.06 3.49,62.86 4.45,63.82 10.16,63.82
  Bottom 1.524: IC5.1 12.38,63.82 | 10.16,63.82 C21.1 11.43,63.82
N$13
  Bottom 1: IC5.3 IC5.4 13.42,56.11
  Bottom 1.016: 11.43,58.74 12.38,58.74 | 10.16,58.74 X15.1 | DC4.5 11.87,49.66 13.34,51.12 IC5.4
  Bottom 1.524: IC5.4 12.38,56.2 | IC5.3 12.38,58.74 | 10.16,58.74 C21.2 11.43,58.74
N$14
  Bottom 1.016: X14.2 12.38,71.44
  Bottom 1.524: IC4.2 12.38,71.44
N$16
  Bottom 1: 65.41,46.04 IC1.32
  Bottom 1.524: C7.1 65.41,46.04
N$17
  Bottom 1: 21.91,71.44 IC6.2
  Bottom 1.524: IC4.7 21.91,71.44
N$19
  Bottom 1: IC4.4 IC4.3
  Bottom 1.016: 12.38,66.36 4.45,66.36 3.49,67.31 3.49,73.03 4.45,73.98 6.98,73.98 8.98,75.97 DC2.5 | X14.1 10.16,68.9 | 11.43,68.9 12.38,68.9
  Bottom 1.524: IC4.4 12.38,66.36 | IC4.3 12.38,68.9 | 10.16,68.9 C22.2 11.43,68.9
N$21
  Bottom 1.016: X15.2 12.38,61.28
  Bottom 1.524: IC5.2 12.38,61.28
N$22
  Bottom 1.016: 11.11,73.98 11.43,73.98 12.38,73.98 | DC2.7 3.81,77.05 3.81,79.06 4.76,80.01 12.38,80.01 13.34,79.06 IC4.1
  Bottom 1.524: IC4.1 12.38,73.98 | C22.1 10.16,73.98 | C22.1 11.11,73.98 | C22.1 11.43,73.98
N$23
  Bottom 1.016: X2.1 87,33.34 IC1.4
N$24
  Bottom 1.016: IC1.2 85.41,28.26 87,29.84 JP4.2 94.62,27.31
  Bottom 1.524: R10.1 94.62,27.31
N$32
  Bottom 1: 21.91,61.28 IC9.2
  Bottom 1.524: IC5.7 21.91,61.28
N$37
  Bottom 1: JP3.10 IC2.10
  Bottom 1.016: JP5.2 JP3.10 118.11,61.28 | 112.08,63.18 IC2.10
  Bottom 1.524: C9.1 112.08,63.18 | R2.2 118.11,61.28
N$41
  Bottom 1: IC1.9 JP1.4 92.71,46.04 | 93.98,46.04 95.89,46.04
  Bottom 1.524: 95.89,46.04 R1.1 97.16,46.04 | 92.71,46.04 C5.1 93.98,46.04
N$43
  Bottom 1: IC1.12 96.84,53.66 98.43,55.25 98.43,61.15 | 98.43,61.15 98.43,63.82 | 98.43,66.04 98.43,63.82 | 98.43,63.82 98.3,63.82 X1.1 98.43,61.15
  Bottom 1.524: 98.43,67.31 C2.1 98.43,66.04 | X1.1 96.52,62.55
N$44
  Bottom 1: IC1.13 89.53,56.2 90.81,57.47 90.81,61.59 | 90.81,61.59 90.81,63.82 | 90.81,66.04 90.81,63.82 | X1.2 92.08,62.55 90.81,63.82 | 91.76,62.55 90.81,61.59
  Bottom 1.524: 90.81,67.31 C4.1 90.81,66.04 | 92.71,62.55 X1.2 91.76,62.55
S$1
  Bottom 2.54: -1.27,92.39 -1.27,101.28 6.67,101.28
S$2
  Bottom 2.54: 7.62,-1.27 -1.27,-1.27 -1.27,6.67
S$3
  Bottom 2.54: 161.29,7.62 161.29,-1.27 153.35,-1.27
S$4
  Bottom 2.54: 152.4,101.28 161.29,101.28 161.29,93.34
SCK
  Bottom 1: IC1.8 JP1.3 IC2.18
SS  (via drill 0.75 pad 1.52)
  Top 1: v101.28,35.88 v101.28,46.04
  Bottom 1: 102.24,46.04 IC2.17 | 100.65,35.88 IC1.5
  Bottom 1.524: v101.28,46.04 102.24,46.04 | 101.92,35.88 v101.28,35.88 100.65,35.88
(copper drawn outside any net)
  shapes: Bottom circle x12